# Altium PCB PCB1.PcbDoc
Units mil, origin at the board's own origin, x right, y up, seen from the top; angles counter-clockwise.
Board outline 930 x 525 mil, 2 copper layers (Top Layer, Bottom Layer); 8 components, 5 nets, 23 pads, 0 vias.
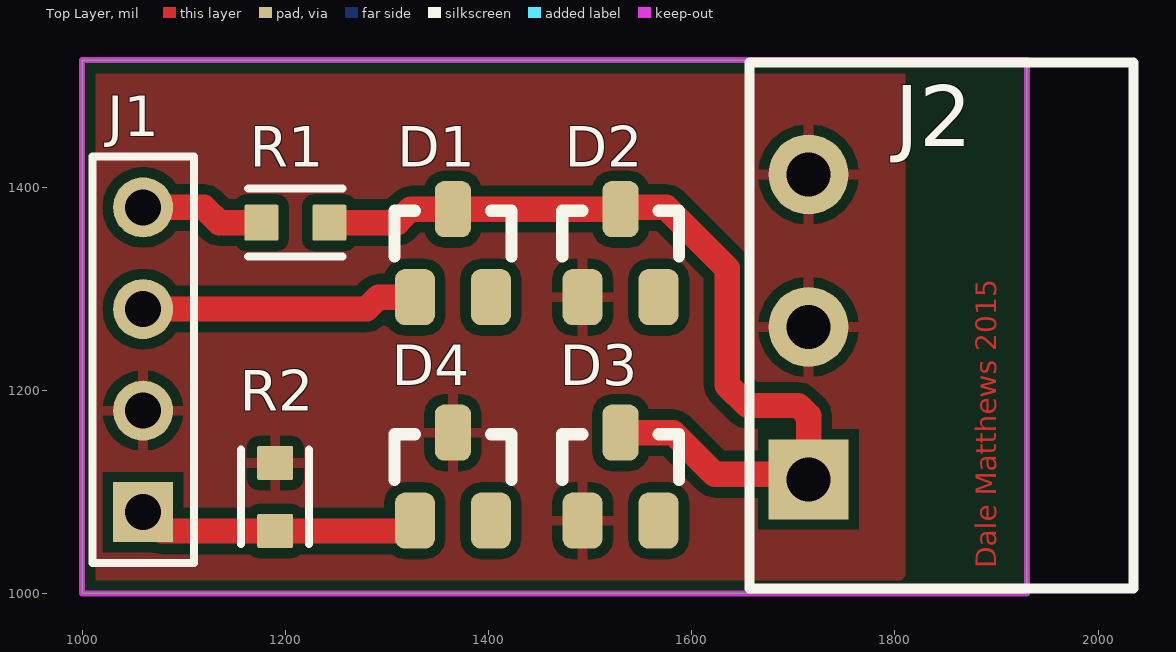
[diagram p0: Top Layer view]
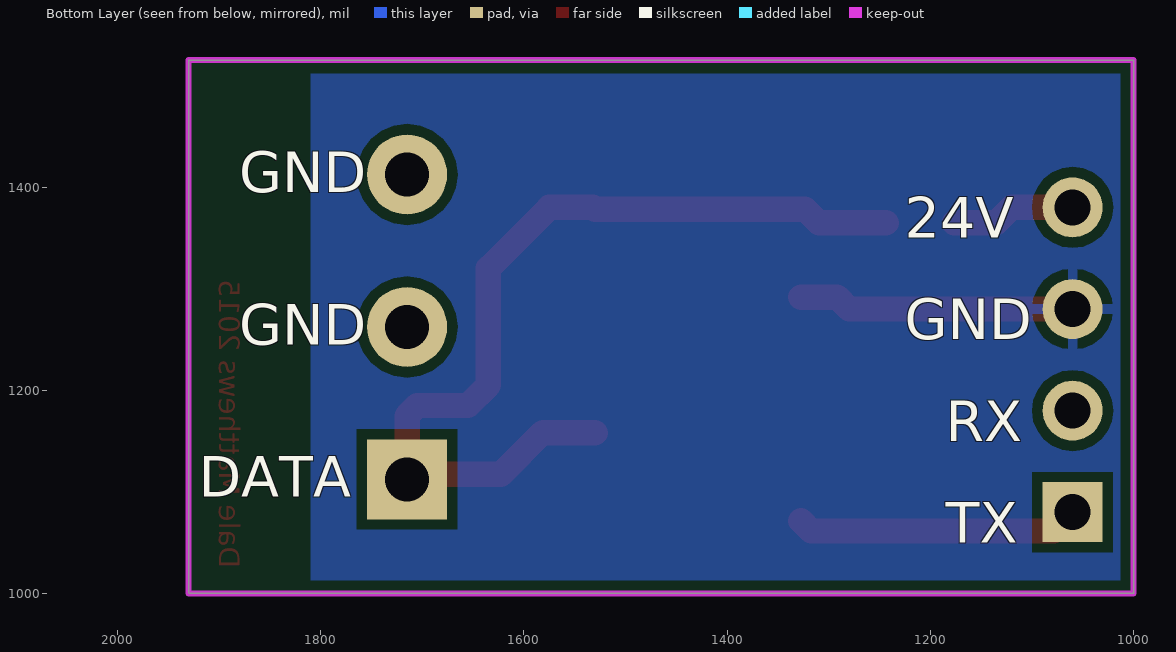
[diagram p1: Bottom Layer view, seen from below]
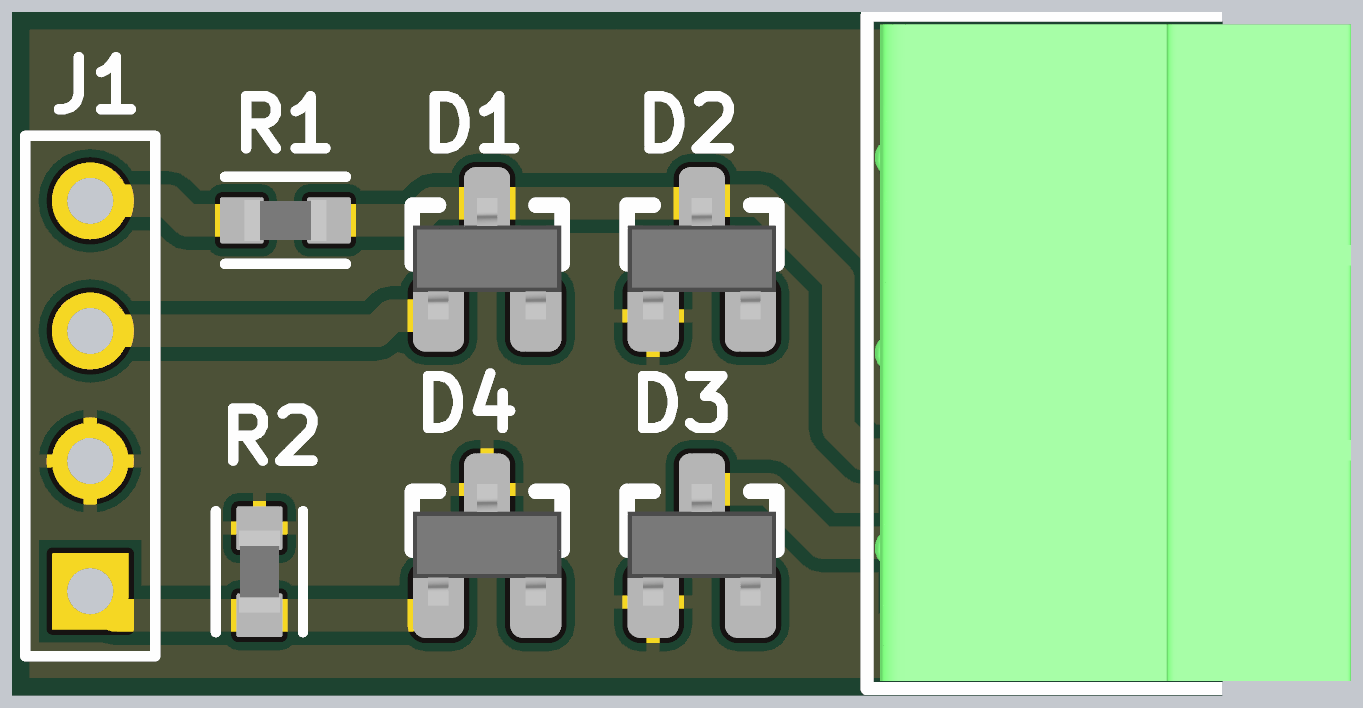
[diagram p2: 3D render of the assembled board from above, using the file's embedded part models]

## Layer stack, top to bottom
Top Solder: solder mask 0.4, Solder Resist, Dk 3.5
Top Layer: signal copper 1.4
Dielectric 1: dielectric 12.6, FR-4, Dk 4.8
Bottom Layer: signal copper 1.4
Bottom Solder: solder mask 0.4, Solder Resist, Dk 3.5

## Board outline
1000,1000 1000,1525 1930,1525 1930,1000

## Design rules (kind name [scope] priority, off if disabled: settings)
Clearance [All] p1: gap=10
PolygonConnect [All] p1: connectstyle=Relief reliefconductorwidth=10 reliefentries=4 polygonreliefangle="90 Angle" airgapwidth=10
RoutingVias [All] p1: holewidth=28 width=50 viastyle="Through Hole" minholewidth=28 minwidth=50 maxholewidth=28 maxwidth=50
SolderMaskExpansion [All] p1: expansion=4
Width [All] p1: maxlimit=100 minlimit=10 preferedwidth=10
30 further rules are at their usual default settings.

## Components (designator, comment, footprint, x,y, rotation, side; value= is the part's Value field where it differs from the comment)
D1 "3.9V" SOT23 1365,1335 r90 top
D2 "100V" SOT23 1530,1335 r90 top
D3 "6.2V" SOT23 1530,1115 r90 top
D4 "100V" SOT23 1365,1115 r90 top
J1 "Header 4" HDR1X4 1060,1080 r90 top
J2 "Header 3" PH_TERM_3 2030,1010 r90 top
R1 "4K7" RESC1608 1210,1365 r0 top
R2 "1K5" RESC1608 1190,1095 r90 top

## Footprints (in the part's own frame and the unit in brackets; to place one, negate y for a bottom-side part, rotate by r counter-clockwise, add the part's x,y. Pads: shape width x height; smd on the part's side, far side on the other; paste and mask are expansions set on the pad)
HDR1X4 [mm] "Connector; Header; 4 Position"
  rect 1.5x1.5 hole 0.9: 1(0,0)
  round 1.5 hole 0.9: 2(2.54,0) 3(5.08,0) 4(7.62,0)
  silkscreen extent -1.27,-1.27 8.89,1.27
PH_TERM_3 [mm] "Phoenix Terminal 3 way pluggable"
  rect 2x2 hole 1.1: 1(2.6,8)
  round 2 hole 1.1: 2(6.41,8) 3(10.22,8)
  silkscreen extent -0.13,-0.12 13.03,9.48, body extent 0.03,0.03 12.84,9.32, height 7.25
RESC1608 [mm] "Chip Resistor, 1.6mm x 0.8mm x ?mm (0603)"
  rrect10% 0.85x0.9 smd: 1(-0.85,0) 2(0.85,0)
  silkscreen extent -1.18,-0.85 1.18,0.85, body extent -0.8,-0.4 0.8,0.4, height 0.4
SOT23 [mm]
  rrect50% 1.4x1 smd: 1(-1.1,0.95) 2(-1.1,-0.95)
  rrect50% 1.4x0.9 smd: 3(1.1,0)
  silkscreen extent -0.08,-1.46 1.06,1.46, body extent -1.17,-1.45 1.2,1.45, height 1

## Part data
D1: library part BZX84C3V9LT1G, "DIODE ZENER 3.9V 225MW SOT23-3"
D2 D4: library part BAR46FILM, "DIODE SCHOTTKY 100V 150MA SOT23"
D3: library part BZX84C6V2LT1G, "DIODE ZENER 6.2V 225MW SOT23-3"
J1: "Header, 4-Pin"
J2: "Header, 3-Pin"
R1: library part RC0603FR-074K7L, "RES SMD 4.7K OHM 1% 1/10W 0603"
R2: library part RC0603FR-071K5L, "RES SMD 1.5K OHM 1% 1/10W 0603"

## Nets (pads, with @x,y where several pads share a name; then routed paths per layer and width w, separated by ;. In a path a pad name is that pad's centre, name@x,y a point inside that pad or via, vN(x,y) a via of type N, cw(c..) or ccw(c..) an arc to the next point about the centre after c; other vN are vias at no path point)
24V: J1.4 R1.1 | length 122.7
  Top Layer w25: J1.4 1120,1380 1135,1365 R1.1
DATA: D1.3 D2.3 D3.3 J2.1 R1.2 | length 894.7
  Top Layer w25: R1.2 1310,1365 1323.31,1378.31 D1.3 D2.3 1531.69,1380 1575,1380 1635,1320 1635,1205 1655,1185 1705,1185 1715.04,1174.96 J2.1@1715.04,1117.36 ; D3.3 1581.69,1158.31 1622.64,1117.36 J2.1@1715.04,1117.36 ; J2.1 J2.1@1715.04,1117.36
SERIAL_GND: D1.1 J1.3 | length 272.4
  Top Layer w25: J1.3 1280,1280 1291.69,1291.69 D1.1
SERIAL_RX: D2.1 D3.1 D4.3 J1.2 J2.2 J2.3 R2.2
SERIAL_TX: D4.1 J1.1 R2.1 | length 279.5
  Top Layer w25: J1.1 1078.46,1061.54 R2.1 1317.44,1061.54 D4.1
pads on no net: D1.2 D2.2 D3.2 D4.2

## Polygon pours and split planes (outlines as drawn)
SERIAL_RX on Top Layer "SERIAL_RX" (solid, remove dead copper, pour order 4): 1810,1515 1810,1010 1010,1010 1010,1515
SERIAL_GND on Bottom Layer "SERIAL_RX" (solid, remove dead copper, pour order 3): 1010,1515 1810,1515 1810,1010 1010,1010 1010,1515

## Keep-outs
Keep-Out Layer:
  lines w5.91: 1000,1000 1925,1000 1930,1000 1930,1525 1000,1525 1000,1000

## Other copper
Top Layer:
  text "Dale Matthews 2015" at 1900,1025 h20 r90

## Silkscreen, mask and mechanical layers (free items; w line width, h text height)
Bottom Overlay:
  text "GND" at 1880.01,1395 h40
  text "24V" at 1224.99,1350 h40
  text "GND" at 1224.99,1250 h40
  text "GND" at 1880.01,1245 h40
  text "RX" at 1185,1150 h40
  text "DATA" at 1920,1095 h40
  text "TX" at 1185,1050 h40